# Altium PCB XPIAC-C_1V3.PCBDOC (part 3 of 4)
Units mil, origin at the board's own origin, x right, y up, seen from the top; angles counter-clockwise.
Board outline 2484.32 x 1736.28 mil, 6 copper layers (Top Layer, Internal Plane 1, Mid-Layer 1, Mid-Layer 2, Mid-Layer 3, Bottom Layer); 176 components, 110 nets, 677 pads, 395 vias.
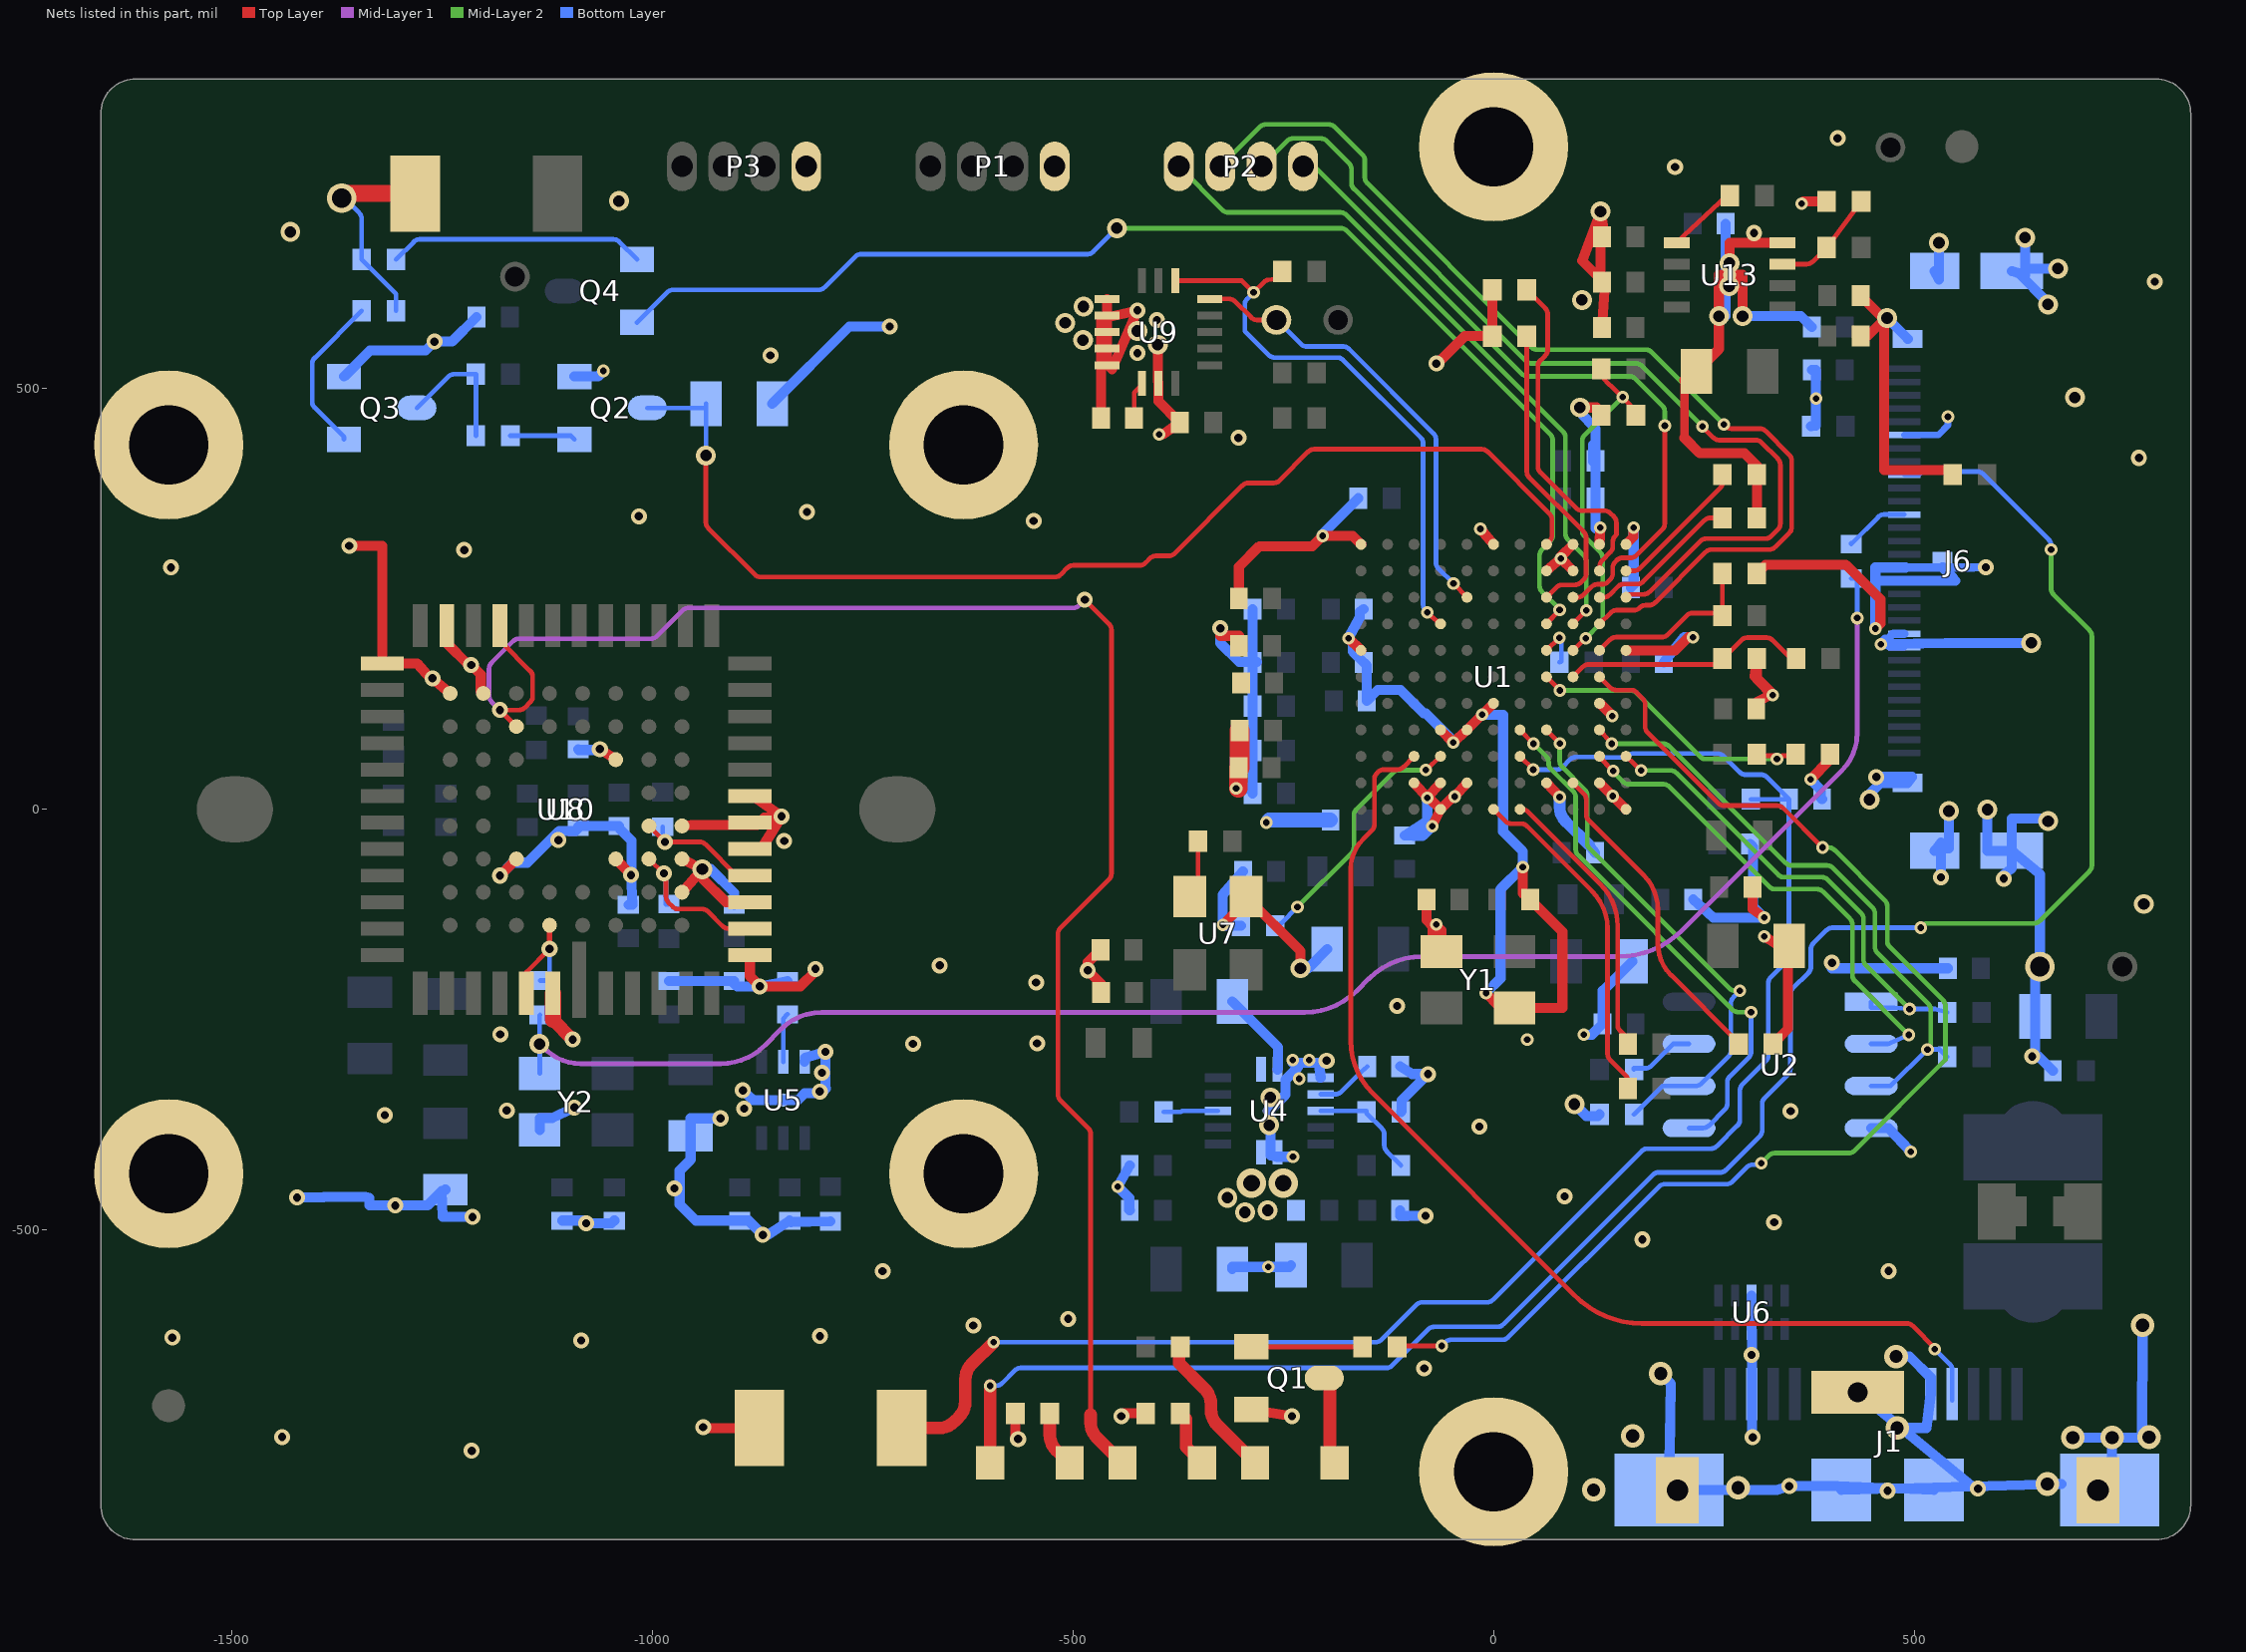
[diagram p7: the nets of this part, all layers, seen from the top]

## Via types
v1: diameter 15, hole 7.87, Top Layer to Bottom Layer, 163 vias
v2: diameter 19, hole 9.84, Top Layer to Bottom Layer, 131 vias
v3: diameter 23.62, hole 13.78, Top Layer to Bottom Layer, 77 vias
v4: diameter 27.95, hole 15.75, Top Layer to Bottom Layer, 17 vias
v5: diameter 0, hole 0, Top Layer to Bottom Layer, 3 vias
v6: diameter 20.47, hole 11.81, Top Layer to Bottom Layer, 2 vias
v7: diameter 35, hole 19.68, Top Layer to Bottom Layer, 2 vias

## Nets (pads, with @x,y where several pads share a name; then routed paths per layer and width w, separated by ;. In a path a pad name is that pad's centre, name@x,y a point inside that pad or via, vN(x,y) a via of type N, cw(c..) or ccw(c..) an arc to the next point about the centre after c; other vN are vias at no path point) (continued)
GND: C1.1 C2.2 C3.1 C4.1 C5.1 C6.1 C7.1 C8.1 C9.1 C10.1 C11.1 C12.1 C13.1 C14.1 C15.1 C16.1 C17.1 C18.2 C19.1 C20.2 C21.1 C22.1 C23.1 C24.1 C25.1 C26.1 C27.1 C28.1 C29.1 C30.2 C31.1 C32.2 C33.1 C34.1 C35.1 C36.2 C37.1 C38.1 C39.1 C40.2 C43.1 C44.1 C45.1 C46.1 C48.1 C49.1 C50.2 C51.1 C52.1 C53.1 C54.1 C55.2 C56.2 C57.1 C58.1 C59.1 C60.1 C61.1 C65.1 C66.1 C68.1 C76.2 C77.1 C78.1 C79.1 C81.1 C82.1 C86.1 C94.1 C95.1 C97.1 C98.1 GND.1 H1.1 H2.1 H3.1 H4.1 H5.1 H6.1 J1.5 J1.8 J1.11 J1.12 J1.13 J1.14 J1.15 J1.16 J1.17 J6.6 J6.16 J6.17 J6.21 J6.22 J6.33 J6.34 J6.35 J6.36 J6.37 J6.38 J6.39 P1.4 P3.4 Q1.2 Q2.2 Q3.2 R4.1 R12.2 R16.2 R17.2 R18.2 R19.2 R20.2 R21.2 R28.2 R29.2 R30.2 R31.2 R32.2 R39.2 R42.2 R53.2 R58.1 R61.1 R67.1 S2.2 U1.A1 U1.A8 U1.B2 U1.B4 U1.B7 U1.B8 U1.B9 U1.D7 U1.D8 U1.E2 U1.E6 U1.G1 U1.G11 U1.K3 U1.K4 U1.L1 U1.L2 U1.L3 U1.L6 U1.L11 U2.4 U4.6 U4.11 U4.12 U4.13 U4.14 U4.15 U5.3 U5.7 U6.3 U6.8 U7.2 U8.B1 U8.C1 U8.C3 U8.C6 U8.D1 U8.F3 U8.H7 U8.H8 U9.9 U9.10 U9.11 U9.12 U9.13 U9.15 U10.7 U10.9 U10.11 U10.12 U10.13 U10.29 U10.31 U10.48 U13.8 U13.9 Y1.2 Y1.4 Y2.2 | length 13355.2
  Top Layer w10: 226.88,441.44 C2.2@226.88,510.2
  Top Layer w12: v2(-1360.14,313.21) -1320.87,313.21 U10.31@-1320.87,173.23 -1279.3,173.23 -1263.55,155.77 v2(-1261.27,155.77) U8.H8@-1240.16,137.8 ; U10.29@-1244.09,218.5 -1244.11,197.42 -1218.39,171.69 v2(-1215.2,171.69) -1203.84,160.34 -1203.84,140.85 U8.H7@-1200.79,137.8 ; v2(-1181.1,-78.74) U8.C6@-1161.42,-59.06 ; v2(-1062.22,71.57) U8.F3@-1043.31,59.06 ; U8.C3@-1043.31,-59.06 v2(-1025.18,-78.13) ; U8.B1@-964.57,-98.43 v3(-940.4,-71.2) ; U8.C1@-964.57,-59.06 v3(-940.4,-71.2) ; U8.D1@-964.57,-19.69 -953.25,-18.6 -875.42,-18.6 -866.86,-10.05 -863.66,-10.05 v2(-846.28,-8.4) ; v2(-939.47,-734.35) -938.48,-735.34 S2.2@-872.67,-735.34 ; U10.7@-883.86,-173.23 -883.86,-198.33 -872.06,-210.12 v2(-872.06,-210.42) -823.94,-210.42 -806.06,-192.54 v2(-806.06,-189.66) ; U10.9@-883.86,-110.24 -912.38,-110.24 -940.06,-82.56 -940.06,-71.55 v3(-940.4,-71.2) ; U10.11@-883.86,-47.24 -866.91,-47.24 -866.91,-41.68 v2(-846.28,-8.4) ; U10.13@-883.86,15.75 -880.34,15.75 v2(-846.28,-8.4) ; R58.1@-568.39,-717.91 -568.39,-745.13 v2(-565.13,-748.39) ; C51.1@-467.34,-166.89 -482.3,-181.85 v2(-482.3,-191.32) -482.3,-191.53 -466.49,-207.35 C25.1@-466.53,-217.63 C25.1@-466.53,-217.63 ; C57.1@-466.52,465.15 -466.52,583.01 v2(-423.28,593.05) -453.51,523.23 U9.13@-459.18,527.93 U9.12@-459.18,547.62 U9.11@-459.18,567.3 U9.10@-459.18,586.99 U9.9@-459.18,606.67 ; v2(-442.36,-721.31) -438.96,-717.91 R67.1@-413.23,-717.91 ; v3(-399.09,552.24) -399.09,510.49 U9.15@-398.15,506.28 -398.15,485.04 -373.07,459.95 C58.1@-372.67,459.95 -392.86,445.8 v1(-397.41,445.8) ; v2(-324.61,215.26) -324.61,206.31 -302.67,206.31 C13.1@-302.67,194.34 ; v1(-321.79,-137.51) -293.97,-108.19 U7.2@-293.97,-103.9 -229.54,-168.33 v3(-229.54,-188.92) ; v1(-306,24.74) v1@-303.09,24.74 ; C40.2@-303.09,49.49 C40.2@-301.69,49.49 ; C4.1@-302.67,250.64 -302.67,288.3 -278.24,312.73 -215.35,312.73 v1(-203.12,324.97) -167.49,324.97 U1.L11@-157.48,314.96 ; Q1.2@-287.83,-713.37 -239.84,-721.04 v2(-239.57,-721.31) ; v1(-172.36,203.3) U1.G11@-157.48,188.98 ; U1.B9@-94.49,31.5 v1(-78.74,13.79) ; C50.2@-79.69,-107.26 -79.69,-131.86 -72.26,-139.28 -72.26,-170.96 Y1.2@-61.81,-169 -61.81,-143.89 -64.77,-140.93 v1(-67.88,-136.78) ; v1(-72.92,-20.14) U1.A8@-62.99,0 ; v2(-67.87,529.81) -66.93,529.81 -34.33,562.41 R16.2@-1.42,562.41 R12.2@-1.42,617.51 ; U1.B8@-62.99,31.5 v1(-78.74,13.79) ; U1.D8@-62.99,94.49 v1(-47.98,79.47) U1.D7@-31.5,94.49 U1.E6@0,125.98 v1(-13.35,112.46) ; U1.B7@-31.5,31.5 v1(-46.27,15.23) -47.76,15.23 U1.A8@-62.99,0 ; v1(-15.67,333.39) U1.L6@0,314.96 ; v1(-9,-218.26) 6.7,-233.96 Y1.4@24.81,-235.92 81.93,-235.92 81.93,-145.51 C49.1@43.69,-107.26 34.8,-99.66 v1(34.8,-68.51) ; U1.B4@62.99,31.5 v1(78.67,14.53) ; U1.K4@62.99,283.46 v1(79.9,298.06) ; U1.K3@94.49,283.46 v1(79.9,298.06) ; U1.L3@94.49,314.96 79.9,300.37 v1(79.9,298.06) ; v3(102.68,477.58) 122.66,477.58 R29.2@128.29,468.3 ; U1.B2@125.98,31.5 v1(141.73,15.75) U1.A1@157.48,0 ; U1.E2@125.98,125.98 127.83,124.52 127.94,124.52 140.93,111.52 v1(140.93,110.94) ; U1.L2@125.98,314.96 v1(126.91,334.91) ; C33.1@129.08,572.7 C55.2@132.64,624.73 ; C16.1@129.08,680.64 132.64,680.59 v3(127.21,710.51) ; U1.G1@157.48,188.98 215.96,188.98 231.8,204.82 v1(236.96,204.66) ; U1.L1@157.48,314.96 166.3,323.78 166.3,334.64 v1(166.51,334.84) ; 226.88,441.44 244.9,423.42 298.13,423.42 313.11,408.44 R17.2@313.11,398 R19.2@313.11,346.42 ; C2.2@226.88,510.2 C2.2@241.22,520.35 267.97,547.1 v3(267.97,586.22) 267.97,635.22 U13.9@280.59,635.22 ; v3(296.07,586.22) 296.07,635.22 U13.9@280.59,635.22 ; C21.1@307.69,-92.52 307.69,-118.42 v1(321.99,-128.72) ; C60.1@312.32,119.41 313.34,120.42 313.34,127.53 v1@331.71,137.17 ; R31.2@313.11,280.21 323.6,290.7 418.86,290.7 459.86,249.7 459.86,220.75 v1(453.98,214.86) ; v1(321.99,-151.09) 351.37,-170.22 C20.2@351.38,-162.25 350.07,-163.57 350.07,-261.01 R21.2@332.19,-278.88 ; U13.8@343.58,673.6 280.59,673.6 U13.9@280.59,635.22 ; v1(366.15,720.06) 368.61,722.52 R53.2@396.05,722.52 ; v1(376.79,35.63) 376.13,35.08 400.2,59.42 R32.2@400.2,65.57 ; C98.1@436.2,562.56 444.7,562.56 v3@466.16,584.02 ; C56.2@436.2,610.56 462.75,584.02 v3@466.16,584.02 ; R30.2@545.55,398 540.09,403.46 464.25,403.46 464.25,543.02 464.25,580.47 v3(467.8,584.02) v3@466.16,584.02 ; v1(-78.74,13.79) -76.78,13.79 U1.A8@-62.99,0 ; v3(127.21,710.51) 127.21,628.54 C55.2@129.08,626.67 C55.2@132.64,624.73 ; v3(127.21,710.51) 105.34,652.03 C55.2@132.64,624.73 ; v1@331.71,137.17 v1(331.69,135.83) 313.11,154.41 R28.2@313.11,179.18 310.56,158.32 v1@331.71,137.17
  Top Layer w15.75: -1118.11,-250.06 v2(-1094.57,-273.6)
  Top Layer w19.68: -1118.11,-250.06 U10.48@-1118.11,-218.5
  Top Layer w21.65: v1@-303.09,24.74 C40.2@-303.09,49.49
  Top Layer w23.62: C40.2@-301.69,49.49 C7.1@-301.69,93.74
  Bottom Layer w7.87: v1(460.28,196.11) 470.2,196.17 470.2,192.91 J6.22@488.19,192.91 ; J6.6@488.19,444.88 528.53,444.88 540.16,456.51 v1(540.16,466.71)
  Bottom Layer w9.84: v1@-46.33,79.47 v1(-13.35,112.46) ; 468.23,201.73 475.16,208.66 J6.21@488.19,208.66 ; J6.16@488.19,287.4 489.78,287.4 533.99,287.4 570.41,287.4 v2(585.24,287.81)
  Bottom Layer w12: v2(-1422.06,-461.35) -1390.87,-461.35 -1390.16,-460.63 -1341.03,-460.63 -1336.13,-461.79 -1336.13,-470.8 v2(-1305.47,-470.8) -1267.2,-470.8 C39.1@-1250.25,-453.85 ; Q3.2@-1366.34,514.5 -1335.33,545.5 -1269.29,545.5 v2(-1258.85,555.94) -1238.04,555.94 C22.1@-1208.79,585.2 ; C39.1@-1245.9,-451.99 C39.1@-1250.25,-453.85 ; v2(-1213.54,-484.47) -1249.34,-484.47 C39.1@-1250.25,-453.85 ; v2(-1181.1,-78.74) -1165.73,-63.37 -1148.46,-63.37 -1110.7,-25.61 -1090.91,-25.61 -1084.99,-19.69 C77.1@-1039.44,-19.69 ; Y2.2@-1133.74,-380.95 -1133.74,-367.17 -1118.98,-367.17 v2(-1092.54,-354.29) ; C46.1@-1107.11,-488.81 -1081.6,-488.81 v2(-1078.44,-491.96) -1048.24,-491.96 C82.1@-1045.08,-488.81 ; Q2.2@-1092.48,514.5 -1064.55,514.5 v1(-1057.91,521.14) ; C44.1@-1088.01,-20.75 -1087.56,-19.69 C77.1@-1039.44,-19.69 ; C61.1@-1088.01,71.28 -1087.29,70.57 -1063.22,70.57 v2(-1062.22,71.57) ; C52.1@-1028.36,-113.51 -1023.62,-113.51 v2(-1025.18,-78.13) -1024.73,-66.55 -1024.73,-37.08 -1039.46,-22.34 C77.1@-1039.44,-19.69 ; C86.1@-980.26,-204.19 C76.2@-905.41,-204.19 ; v3(-940.4,-71.2) -930.69,-70.99 -902.56,-99.11 C48.1@-902.56,-113.51 ; v2(-918.85,-367.28) -954.45,-367.28 C45.1@-954.45,-388.18 -954.45,-416.35 -967.48,-429.38 -967.48,-469.48 -948.16,-488.81 C78.1@-896.1,-488.81 -885.61,-488.81 v2(-868.59,-505.83) -862.82,-505.83 C79.1@-836.63,-488.81 -834.9,-490.54 R42.2@-788.1,-489.59 ; C76.2@-902.56,-204.19 C76.2@-905.41,-204.19 ; v2(-892.23,-334.07) -879.91,-345.5 U5.7@-844.38,-345.53 -826.76,-345.53 -818.89,-337.47 -799.57,-337.47 -798.43,-336.4 -793.84,-331.8 v2@-793.53,-331.8 ; R61.1@-857.35,482.25 -765.78,573.81 v2(-717.66,573.81) ; C81.1@-839.24,-204.19 v2(-872.06,-210.42) -899.18,-210.42 C76.2@-905.41,-204.19 ; U5.3@-818.79,-300.25 -818.49,-295.43 v2(-794.15,-288.17) -794.15,-331.19 v2@-793.53,-331.8 ; v2(-800.78,-335.44) -796.33,-335.44 v2@-793.53,-331.8 ; C36.2@-432.43,-476.51 -433.08,-475.86 -433.08,-461.93 v1(-446.65,-448.37) C37.1@-432.43,-423.19 ; v2(-324.61,215.26) -324.61,197.43 -302.4,175.23 -281.39,175.23 C95.1@-286.22,174.52 ; C65.1@-310.54,-546.32 -310.54,-543.79 v1(-267.78,-543.79) -242.57,-543.79 C34.1@-240.76,-541.97 ; C32.2@-310.54,-228.3 -255.99,-282.86 -255.99,-308.46 U4.15@-256.68,-309.15 ; v1(-306,24.74) -286.22,24.74 C29.1@-286.22,18.91 C24.1@-286.22,69.95 C66.1@-286.22,122.78 C95.1@-286.22,174.52 ; R20.2@-300.24,-138.31 -320.99,-138.31 v1(-321.79,-137.51) -321.79,-101.69 C8.1@-297.87,-73.8 ; C97.1@-286.22,238.01 C95.1@-286.22,174.52 ; v1(-270.04,-15.58) v1@-267.06,-12.6 ; U4.11@-266.52,-358.36 -247.48,-339.32 ; v1(-238.39,-412.92) -257.02,-412.92 -264.94,-411.64 -264.94,-356.78 -247.48,-339.32 ; v3(-229.54,-188.92) -220.44,-188.92 C18.2@-197.54,-166.02 ; U4.6@-205.5,-318.99 -207.47,-301.09 -238.78,-301.09 v1(-238.78,-298.08) -232.63,-304.23 -232.63,-306.75 -247.48,-321.6 -247.48,-339.32 ; v1(-203.12,324.97) -203.12,327.31 C23.1@-160.69,369.74 ; C26.1@-154.11,238.01 -158.94,234.74 -158.94,228.14 v1(-172.36,203.3) -167.25,198.18 -167.25,187.49 C9.1@-154.11,174.52 -150.49,170.9 C10.1@-150.49,128.99 -137.59,141.88 -110.75,141.88 -82.96,114.09 -80.42,114.09 -50.13,83.79 -50.13,82.67 -47.98,80.52 v1(-47.98,79.47) v1@-46.33,79.47 ; C59.1@-110.8,-476.51 -110.8,-483.15 v2(-80.88,-483.15) ; C38.1@-110.8,-305.56 -96.63,-314.58 v2(-77.92,-314.58) -109.33,-345.99 -109.33,-358.88 R18.2@-110.01,-359.56 ; v1(-78.74,13.79) -78.74,-13.67 C19.1@-105.6,-31.24 -94.75,-31.35 -84.13,-31.35 v1(-72.92,-20.14) ; v1(-13.35,112.46) 11.31,112.46 11.31,-26.33 34.8,-49.81 v1(34.8,-68.51) 8.41,-94.9 8.41,-200.85 v1(-9,-218.26) ; v3(96.18,-350.32) 110.33,-364.47 124.12,-364.47 R4.1@126.03,-362.55 ; v3(102.68,477.58) 102.68,472.29 121.12,452.22 C94.1@121.12,414.12 118.63,433.24 118.63,413.56 121.12,411.06 C5.1@121.12,369.74 121.12,334.79 121.19,334.72 121.19,334.21 v1(126.91,334.91) ; v1(107.52,-267.83) 116.8,-267.83 C1.1@129.6,-255.03 129.6,-215.23 130.47,-215.23 C30.2@165.05,-180.65 ; C31.1@113.68,-42.45 C31.1@120.59,-51.64 ; C3.1@163.19,263.56 166.51,266.89 v1(166.51,334.84) ; v4(198.81,-670.78) 210.87,-682.83 J1.16@208.67,-809.05 ; C14.1@202.56,174.71 226.69,204.98 v1(236.96,204.66) ; J1.12@218.51,-809.05 336.87,-809.06 v2(351.48,-804.38) 408.37,-804.38 J1.14@523.63,-809.05 ; C11.1@237.58,-107.03 261.19,-128.72 v1(321.99,-128.72) 308.56,-115.28 308.56,-44.53 C27.1@305.03,-41 ; v3(267.97,586.22) 268.4,586.65 276.08,586.65 C28.1@276.08,696.14 ; v3(296.07,586.22) 365.25,586.22 C54.1@378.25,573.21 ; U6.8@306.84,-578.16 U6.3@306.84,-617.53 307.09,-619.64 J1.8@307.09,-694.88 307.09,-745.33 v2(308.13,-746.38) ; v1(376.79,35.63) 389.08,23.34 389.08,13.56 C35.1@390.57,12.07 ; R39.2@377.47,455.41 382.98,455.77 382.98,482.08 v1(383.45,488.42) 383.23,493.62 383.23,522.21 C53.1@378.25,522.21 ; v2(402.26,-182.36) 402.26,-188.9 C15.1@540.12,-188.9 ; J1.15@413.39,-809.05 674.87,-801.89 v4(658.19,-801.89) ; J1.13@433.07,-692.91 574.33,-809.06 v2(575.95,-807.44) ; v3(447.04,11.61) 447.04,18.36 460.17,31.5 J6.38@492.13,31.5 497.19,38.52 v2(455.1,38.52) ; U2.4@448.9,-378.75 469.57,-378.75 v1(496.01,-406.96) ; v1(453.98,214.86) 453.98,277.29 ; v3(467.8,584.02) 492.77,559.06 J6.37@492.13,559.06 ; 468.23,201.73 465.56,201.73 v1(460.28,196.11) 537,197.59 639.16,197.59 v3(639.33,197.76) ; v4(478.56,-650.3) 494.6,-650.3 519.69,-675.38 J1.5@519.69,-694.88 514.74,-735.2 v4(479.82,-735.2) ; J6.16@489.78,287.4 453.98,287.4 453.98,277.29 ; J6.34@524.41,-49.21 J6.34@526.5,-46.43 ; J6.33@524.41,639.76 529.56,629.92 v3(529.56,673.45) ; v2(531.81,-80.83) 531.81,-39.37 J6.34@526.5,-46.43 ; J6.39@533.99,287.4 546.24,275.15 546.24,274.53 549.11,271.65 J6.17@488.19,271.65 453.98,271.65 453.98,277.29 ; v3(541.36,-1.95) 541.36,-46.43 J6.34@526.5,-46.43 ; v3(587.03,-0.17) 587.03,-49.21 J6.35@616.14,-49.21 ; v2(606.41,-82.43) 606.41,-77.36 616.14,-70.02 J6.35@616.14,-49.21 ; J6.36@616.14,639.76 J6.36@624.18,637.21 ; J6.36@631.82,634.78 J6.36@624.18,637.21 ; J6.36@631.83,634.8 J6.36@631.83,642.81 ; v3(631.83,679.51) J6.36@631.83,642.81 ; v3(659.06,600.07) 659.06,602.33 J6.36@624.18,637.21 ; v3(659.21,-13.97) 659.19,-10.96 616.14,-10.96 J6.35@616.14,-49.21 ; C68.1@664.86,-310.72 647.88,-293.74 v2(640.29,-293.74) 643.86,-290.17 C43.1@643.86,-246.16 643.86,-186.99 GND.1@649.46,-186.99 649.46,-77.12 647.2,-74.87 J6.35@616.14,-49.21 ; v3(670.9,642.81) J6.36@631.83,642.81 ; v4(688.53,-746.67) 770.89,-746.67 v4(771.57,-613.27) ; J1.11@718.51,-809.05 735.24,-806.1 v4(735.24,-746.68)
  Bottom Layer w13.78: v1(78.67,14.53) 78.67,2.55 ccw(c102.79,2.55) 85.73,-14.5 C31.1@113.68,-42.45
  Bottom Layer w17.72: v1@-267.06,-12.6 C6.1@-193.68,-12.6
  other v1: -231.08,-320.15 -219.22,-297.87 40.1,-273.76
  other v2: 468.49,-809.86 -1214.61,-762.31 -1440.03,-745.91 -82.36,-664.34 306.81,-648.41 -1084.48,-631.15 -1570.42,-627.93 -800.66,-626.03 -618.35,-613.55 -505.56,-605.54 -726.25,-548.81 469.57,-548.63 176.84,-511.27 333.61,-490.78 84.63,-460.04 -973.63,-450.49 -16.81,-377.05 -1317.94,-363.35 353.08,-358.6 -1172.94,-357.97 -890.78,-355.66 -798.28,-313.15 -198.4,-298.71 -690,-278.68 -542.51,-278.18 -1180.55,-267.56 -114.49,-233.67 -543.72,-205.86 -658.23,-185.44 -843.11,-37.53 -1111.46,-36.53 -1572.11,287.5 -1223.41,308.24 -546.72,342.83 -1015.83,348.4 -816.03,353.52 767.27,417.74 -303.09,441.55 -859.48,539.52 -423.32,542.22 -400.1,581.62 786.11,627.23 309.71,684.97 215.78,763.37 409.06,797.61
  other v3: -295.5,-479.02 -268.48,-476.52 -316.29,-461.56 -266.61,-375.45 -265.17,-342.36 773,-112.48 691.04,489.53 -488.03,557.66 -423.32,568.57 -509.07,578.15 -487.48,597.53 105.16,605.49 280.01,621.8 280.45,649.21 -1430.14,686.36 -1039.65,723.01
  other v4: 118.95,-808.86 290.73,-806.37 779.18,-746.13 165.26,-744.63
  other v7: -287.6,-444.1 -249.78,-444.1
GPIO45: R6.1 U1.F2 | length 1475.7
  Top Layer w5.6: R6.1@-114.58,-638.96 -113.29,-637.67 v1(-61.69,-637.67) ; U1.F2@125.98,157.48 138.85,144.61 ccw(c145.78,151.54) 145.78,141.74 163.25,141.74 cw(c163.25,131.94) 170.18,138.87 177.3,131.75 cw(c170.37,124.82) 180.17,124.82 180.17,98.36 ccw(c189.97,98.36) 183.04,91.44 267.2,7.28 ccw(c274.13,14.21) 274.13,4.41 337.25,4.41 cw(c337.25,-5.39) 344.18,1.54 v1(391.04,-45.32)
  Mid-Layer 2 w5.6: v1(318.07,-420.69) 327.32,-411.45 cw(c334.25,-418.38) 334.25,-408.58 422.17,-408.58 ccw(c422.17,-398.78) 429.1,-405.71 537.18,-297.63 537.18,-233.88 ccw(c527.38,-233.88) 534.31,-226.95 470.97,-163.62 cw(c477.9,-156.69) 468.1,-156.69 468.1,-115.18 ccw(c458.3,-115.18) 465.23,-108.25 405.16,-48.19 ccw(c398.23,-55.12) 398.23,-45.32 v1(391.04,-45.32)
  Bottom Layer w5.6: v1(-61.69,-637.67) -57.34,-633.32 cw(c-50.41,-640.25) -50.41,-630.45 10.44,-630.45 ccw(c10.44,-620.65) 17.37,-627.58 196.6,-448.35 cw(c203.53,-455.28) 203.53,-445.48 276.86,-445.48 ccw(c276.86,-435.68) 283.79,-442.61 301.17,-425.24 cw(c308.09,-432.16) 308.09,-422.36 318.07,-422.36 v1(318.07,-420.69)
IMU_INT: R44.1 U1.H8 U9.6 | length 726.9
  Top Layer w5.6: U9.6@-378.47,628.33 -299.11,628.33 v1(-285.25,614.46) -273.29,626.42 cw(c-266.36,619.49) -267.77,629.19 -251.17,631.6 R44.1@-251.17,639.23 ; v1(-78.81,234.04) -78.74,233.29 U1.H8@-62.99,220.47
  Bottom Layer w5.6: v1(-285.25,614.46) -292.82,606.9 ; v1(-78.81,234.04) v1@-80.74,235.97 ; -295.69,599.97 cw(c-285.89,599.97) -292.82,606.9 ; -295.69,599.97 cw(c-285.89,599.97) -292.82,606.9 ; -295.69,599.97 -295.69,568.45 -267.04,539.8 ; -267.04,539.8 ccw(c-260.11,546.72) -260.11,536.92 ; -267.04,539.8 ccw(c-260.11,546.72) -260.11,536.92 ; -260.11,536.92 -185.71,536.92 ; -185.71,536.92 cw(c-185.71,527.12) -178.78,534.05 ; -185.71,536.92 cw(c-185.71,527.12) -178.78,534.05 ; -178.78,534.05 -86.48,441.75 ; -86.48,441.75 cw(c-93.41,434.83) -83.61,434.83 ; -86.48,441.75 cw(c-93.41,434.83) -83.61,434.83 ; -83.61,242.9 ccw(c-73.81,242.9) v1@-80.74,235.97 ; -83.61,242.9 ccw(c-73.81,242.9) v1@-80.74,235.97 ; -83.61,242.9 -83.61,434.83
LEDOUT0: LED2.1 U8.G6 U10.27 | length 2065.1
  Top Layer w5.6: v2(-1181.1,118.11) -1158.3,118.11 ccw(c-1158.3,127.91) -1151.37,120.98 -1144.99,127.36 ccw(c-1151.92,134.29) -1142.12,134.29 -1142.12,157.52 ccw(c-1151.92,157.52) -1144.99,164.45 -1178.23,197.7 cw(c-1171.3,204.63) -1181.1,204.63 U10.27@-1181.1,218.5 ; v2(-485.78,249.1) -457.04,220.36 cw(c-463.97,213.43) -454.17,213.43 -454.17,-76.29 cw(c-463.97,-76.29) -457.04,-83.22 -514.84,-141.02 ccw(c-507.91,-147.95) -517.71,-147.95 -517.71,-338.93 ccw(c-507.91,-338.93) -514.84,-345.86 -481.8,-378.89 cw(c-488.73,-385.82) -478.93,-385.82 -478.93,-719.43
  Top Layer w6: v2(-1181.1,118.11) U8.G6@-1161.42,98.43
  Top Layer w15: -478.93,-719.43 -478.93,-728.52 ccw(c-452.68,-728.52) -471.24,-747.08 -441.64,-776.68 LED2.1@-440.94,-776.68
  Mid-Layer 1 w5.5: v2(-1181.1,118.11) -1191.16,128.17 cw(c-1184.35,134.97) -1193.98,134.97 -1193.98,167.17 cw(c-1184.35,167.17) -1191.16,173.98 -1165.15,199.99 cw(c-1158.34,193.19) -1158.34,202.81 -1001.6,202.81 ccw(c-1001.6,212.44) -994.79,205.63 -963.78,236.65 cw(c-956.97,229.84) -956.97,239.47 -499.39,239.47 ccw(c-499.39,249.09) -492.59,242.28 v2(-485.78,249.1)
LEDOUT1: J6.9 LED3.1 | length 2363.4
  Top Layer w15: LED3.1@-598.43,-776.68 v1(-598.43,-685.09)
  Mid-Layer 2 w5.6: v1(507.93,-140.7) 513.15,-135.48 642.35,-135.48 ccw(c642.35,-125.68) 649.28,-132.61 708.42,-73.47 ccw(c701.49,-66.54) 711.29,-66.54 711.29,205.78 ccw(c701.49,205.78) 708.42,212.71 665.67,255.47 cw(c672.59,262.39) 662.79,262.39 v1(662.79,308.61)
  Bottom Layer w5.6: v1(-598.43,-685.09) -591.32,-685.09 ccw(c-591.32,-675.29) -584.39,-682.22 -568.93,-666.76 cw(c-562,-673.69) -562,-663.89 -127.47,-663.89 ccw(c-127.47,-654.09) -120.54,-661.02 -77.39,-617.86 cw(c-70.46,-624.79) -70.46,-614.99 4.79,-614.99 ccw(c4.79,-605.19) 11.72,-612.12 189.4,-434.44 cw(c196.33,-441.37) 196.33,-431.57 269.36,-431.57 ccw(c269.36,-421.77) 276.29,-428.7 316.44,-388.55 ccw(c309.51,-381.62) 319.31,-381.62 319.31,-350.13 cw(c329.11,-350.13) 322.18,-343.2 349.98,-315.41 ccw(c343.05,-308.48) 352.85,-308.48 352.85,-219.76 cw(c362.65,-219.76) 355.72,-212.83 374.35,-194.21 ccw(c367.42,-187.28) 377.22,-187.28 377.22,-166.27 cw(c387.02,-166.27) 380.09,-159.34 395.85,-143.57 cw(c402.78,-150.5) 402.78,-140.7 v1(507.93,-140.7) ; J6.9@488.19,397.64 505.76,397.64 506.85,398.72 cw(c513.78,391.79) 513.78,401.59 574.88,401.59 cw(c574.88,391.79) 581.81,398.72 659.92,320.6 cw(c652.99,313.67) 662.79,313.67 v1(662.79,308.61)
MCLK27M: J6.12 R24.1 | length 77.7
  Bottom Layer w5.6: R24.1@425.08,315.35 425.08,316.15 425.85,316.15 457.23,347.52 cw(c464.16,340.59) 464.16,350.39 J6.12@488.19,350.39
MCLK27M': R22.1 U8.A5 U10.47 | length 141
  Top Layer w5.6: U10.47@-1149.61,-218.5 -1149.61,-193.38 v2(-1122.06,-165.84)
  Top Layer w6: v2(-1122.06,-165.84) U8.A5@-1122.05,-137.8
  Bottom Layer w5.6: R22.1@-1133.41,-203.41 -1122.06,-203.41 v2(-1122.06,-165.84)
MCLK27M_ORG: R22.2 R24.2 Y2.3 | length 2423.1
  Mid-Layer 1 w5.6: v3(-1134.02,-278.86) -1125.02,-286.93 ; v1(432.37,227.36) 432.37,90.95 ; -1125.02,-286.93 ccw(c-1084.92,-242.27) -1084.93,-302.29 ; -1125.02,-286.93 ccw(c-1084.92,-242.27) -1084.93,-302.29 ; -1084.93,-302.29 -918.41,-302.29 ; -918.41,-302.29 ccw(c-918.41,-228.68) -866.36,-280.73 ; -918.41,-302.29 ccw(c-918.41,-228.68) -866.36,-280.73 ; -866.36,-280.73 -847.06,-261.44 ; -847.06,-261.44 cw(c-798.55,-309.95) -798.55,-241.34 ; -847.06,-261.44 cw(c-798.55,-309.95) -798.55,-241.34 ; -798.55,-241.34 -224.67,-241.34 ; -224.67,-241.34 ccw(c-224.67,-153.08) -162.26,-215.49 ; -224.67,-241.34 ccw(c-224.67,-153.08) -162.26,-215.49 ; -162.26,-215.49 -147.83,-201.07 ; -147.83,-201.07 cw(c-84.84,-264.07) -84.84,-174.98 ; -147.83,-201.07 cw(c-84.84,-264.07) -84.84,-174.98 ; -84.84,-174.98 148.26,-174.98 ; 148.26,-174.98 ccw(c148.26,-66.95) 224.64,-143.34 ; 148.26,-174.98 ccw(c148.26,-66.95) 224.64,-143.34 ; 224.64,-143.34 413.59,45.61 ; 413.59,45.61 ccw(c368.24,90.95) 432.37,90.95 ; 413.59,45.61 ccw(c368.24,90.95) 432.37,90.95
  Bottom Layer w5.6: v3(-1134.02,-278.86) v3@-1134.02,-277.84 ; Y2.3@-1133.74,-314.02 -1133.74,-277.56 v3@-1134.02,-277.84 ; R22.2@-1133.41,-244.35 -1134.02,-244.96 v3@-1134.02,-277.84 ; R24.2@425.08,274.4 432.37,274.49 v1(432.37,227.36)
NCS: T5.1 U1.J7 U9.5 | length 540.8
  Top Layer w5.6: U9.5@-337.13,606.67 -314.26,606.67 cw(c-314.26,596.87) -307.33,603.8 -288.1,584.57 ccw(c-281.17,591.5) -281.17,581.7 T5.1@-258.07,581.7 ; v1(-47.56,268.29) U1.J7@-31.5,251.97
  Bottom Layer w5.6: T5.1@-258.07,581.7 -257.56,581.7 -228.82,552.96 ccw(c-221.89,559.89) -221.89,550.09 -178.63,550.09 cw(c-178.63,540.29) -171.7,547.22 -71.31,446.83 cw(c-78.24,439.9) -68.44,439.9 -68.44,293.24 ccw(c-58.64,293.24) -65.57,286.31 v1(-47.56,268.29)
NETC38_2: C38.2 U4.7 | length 68.4
  Bottom Layer w5.6: U4.7@-205.5,-338.68 -188.21,-338.68 ccw(c-188.21,-328.88) -181.28,-335.81 -158.64,-313.17 C38.2@-150.17,-305.56
NETC41_1: C41.1 U1.A5 | length 332.2
  Top Layer w5.5: U1.A5@31.5,0 34.31,0 cw(c34.31,-9.62) 41.12,-2.82 126.43,-88.13 cw(c75.49,-139.07) 147.53,-139.07 147.53,-256.13 ccw(c157.15,-256.13) 150.35,-262.94 159.43,-272.02 159.43,-278.31 C41.1@160,-278.88
NETC42_1: C42.1 U1.A6 | length 405.2
  Top Layer w5.5: U1.A6@0,0 14.1,-14.1 ccw(c20.9,-7.29) 20.9,-16.92 32.69,-16.92 cw(c32.69,-26.54) 39.5,-19.73 117.09,-97.33 cw(c72.58,-141.84) 135.53,-141.84 135.53,-290.51 ccw(c145.15,-290.51) 138.35,-297.32 157.18,-316.16 cw(c150.38,-322.96) 160,-322.96 160,-328.32 C42.1@160,-331.68
NETC57_2: C57.2 U9.14 | length 45
  Top Layer w5.6: C57.2@-427.15,465.15 -427.15,495.53 -417.84,504.84 U9.14@-417.84,506.28
NETC81_2: C81.2 U5.2 | length 58.8
  Bottom Layer w5.5: U5.2@-844.38,-300.25 -844.38,-248.71 C81.2@-839.24,-243.56
NETLED1_1: LED1.1 R5.2 | length 173.6
  Top Layer w15: R5.2@-372.29,-638.96 -373.91,-640.58 -373.91,-658.05 -343.49,-688.47 cw(c-362.05,-707.03) -335.8,-707.03 -335.8,-713.49 ccw(c-309.55,-713.49) -328.11,-732.05 LED1.1@-283.48,-776.68
NETLED1_2: LED1.2 Q1.3 | length 108.7
  Top Layer w15: Q1.3@-201.21,-675.97 -194.46,-683.77 -194.46,-776.68 LED1.2@-188.99,-776.68
NETLED2_2: LED2.2 R67.2 | length 69.5
  Top Layer w15: R67.2@-372.29,-717.91 -365.53,-724.66 -365.53,-757.6 LED2.2@-346.46,-776.68
NETLED3_2: LED3.2 R58.2 | length 67.9
  Top Layer w5.6: LED3.2@-504.89,-776.68 LED3.2@-503.94,-776.68
  Top Layer w15: R58.2@-527.45,-717.91 -527.45,-743.25 ccw(c-501.2,-743.25) -519.76,-761.81 LED3.2@-504.89,-776.68
NETQ1_1: Q1.1 R6.2 | length 132.5
  Top Layer w5.6: Q1.1@-287.83,-638.57 -275.57,-639.37 -275.17,-638.96 R6.2@-155.53,-638.96
NETQ2_1: Q2.1 R60.1 | length 78
  Bottom Layer w5.6: R60.1@-1168.63,444.16 -1096.94,444.16 Q2.1@-1092.48,439.7
NETQ3_1: Q3.1 R62.2 | length 191.9
  Bottom Layer w5.6: Q3.1@-1366.34,439.7 -1366.34,442.47 -1401.36,477.49 cw(c-1394.43,484.42) -1404.23,484.42 -1404.23,529.59 cw(c-1394.43,529.59) -1401.36,536.52 R62.2@-1345.47,592.41
NETQ3_3: Q3.3 R59.1 R60.2 | length 159.5
  Bottom Layer w5.6: Q3.3@-1279.72,477.1 -1242.44,514.38 cw(c-1235.51,507.45) -1235.51,517.25 R59.1@-1209.57,517.25 R60.2@-1209.57,444.16
NETQ4_1: Q4.1 R63.2 | length 305.5
  Bottom Layer w5.6: R63.2@-1304.52,653.5 -1283.43,674.59 cw(c-1276.5,667.66) -1276.5,677.46 -1046.07,677.46 cw(c-1046.07,667.66) -1039.14,674.59 Q4.1@-1018.04,653.49
NETR2_1: R2.1 U2.7 | length 78.6
  Bottom Layer w5.6: R2.1@166.98,-309.35 166.98,-307.78 180.33,-307.78 ccw(c180.33,-297.98) 187.26,-304.91 213.41,-278.75 U2.7@232.36,-278.75
NETR12_1: R12.1 U1.K2 | length 412.2
  Top Layer w5.6: R12.1@39.52,617.51 61.53,595.51 cw(c54.6,588.58) 64.4,588.58 64.4,546.32 cw(c54.6,546.32) 61.53,539.39 55.61,533.47 ccw(c62.53,526.54) 52.73,526.54 52.73,407.61 ccw(c62.53,407.61) 55.61,400.68 98.42,357.86 ccw(c105.35,364.79) 105.35,354.99 131.82,354.99 cw(c131.82,345.19) 138.74,352.12 143.26,347.61 cw(c136.33,340.68) 146.13,340.68 146.13,326.44 144.71,325.03 ccw(c151.64,318.1) 141.84,318.1 141.84,312.64 cw(c132.04,312.64) 138.97,305.71 129.14,295.88 ccw(c136.07,288.95) 126.27,288.95 126.27,283.75 U1.K2@125.98,283.46
NETR14_2: R14.2 U4.3 | length 65.2
  Bottom Layer w5.6: R14.2@-392.27,-359.56 -371.45,-359.56 -370.25,-358.36 U4.3@-327.54,-358.36
NETR15_2: R15.2 R18.1 U4.8 | length 135.5
  Bottom Layer w5.6: U4.8@-205.5,-358.36 -150.95,-358.36 R18.1@-150.95,-359.56 -150.95,-361.14 -132.74,-379.35 cw(c-139.67,-386.28) -129.87,-386.28 -129.87,-399.27 ccw(c-120.07,-399.27) -127,-406.2 R15.2@-110.01,-423.19
NETR16_1: R16.1 U1.J4 | length 370.5
  Top Layer w5.6: R16.1@39.52,562.41 39.52,401.51 ccw(c49.32,401.51) 42.39,394.58 107.17,329.81 cw(c100.24,322.88) 110.04,322.88 110.04,280.09 cw(c100.24,280.09) 107.17,273.16 103.64,269.64 cw(c96.71,276.57) 96.71,266.77 81.85,266.77 ccw(c81.85,256.97) 74.92,263.9 U1.J4@62.99,251.97
NETR17_1: R17.1 U1.K1 | length 169.1
  Top Layer w5.6: U1.K1@157.48,283.46 166.86,283.46 ccw(c166.86,293.26) 173.79,286.33 269.3,381.84 ccw(c262.37,388.77) 272.17,388.77 R17.1@272.17,398
NETR19_1: R19.1 U1.J2 | length 183.6
  Top Layer w5.6: U1.J2@125.98,251.97 131,251.97 ccw(c131,261.77) 137.93,254.84 147.92,264.83 cw(c154.85,257.9) 154.85,267.7 171.02,267.7 ccw(c171.02,277.5) 177.95,270.57 250.92,343.55 cw(c257.85,336.62) 257.85,346.42 R19.1@272.17,346.42
NETR20_1: R20.1 U1.C8 | length 304.7
  Top Layer w5.6: v1(-80.45,46.69) U1.C8@-62.99,62.99
  Mid-Layer 2 w5.6: v1(-233.08,-116.25) -168.79,-51.96 ccw(c-175.71,-45.03) -165.91,-45.03 -165.91,-7.01 cw(c-156.11,-7.01) -163.04,-0.08 -119.14,43.82 cw(c-112.21,36.89) -112.21,46.69 v1(-80.45,46.69)
  Bottom Layer w5.6: R20.1@-259.29,-138.31 -259.2,-138.31 ccw(c-259.2,-128.51) -252.27,-135.44 v1(-233.08,-116.25)
NETR21_1: R21.1 U1.B3 | length 386.2
  Top Layer w5.6: U1.B3@94.49,31.5 107.37,18.62 cw(c100.44,11.69) 110.24,11.69 110.24,-5.91 ccw(c120.04,-5.91) 113.11,-12.84 178.17,-77.9 cw(c136.56,-119.5) 195.4,-119.5 195.4,-159.7 ccw(c247.92,-159.7) 210.78,-196.84 291.25,-277.31 R21.1@291.25,-278.88
NETR27_2: R27.2 U7.3 | length 70.7
  Top Layer w5.6: U7.3@-360.9,-103.9 -351.29,-96.26 R27.2@-351.29,-37.86
NETR53_1: R53.1 R57.2 U13.7 | length 128.6
  Top Layer w5.6: U13.7@343.58,648.01 372.25,648.01 ccw(c372.25,657.81) 379.18,650.88 R57.2@396.05,667.75 R53.1@436.99,722.52
NETR56_2: R56.2 U13.1 | length 85.5
  Top Layer w5.6: U13.1@217.6,673.6 277.21,729.28 R56.2@281.16,729.28
NETR62_1: R62.1 R63.1 S1.2 T6.1 | length 251.8
  Top Layer w5.6: T6.1@-1369.12,726.43 T6.1@-1363.57,731.97
  Top Layer w20: T6.1@-1363.57,731.97 S1.2@-1281.9,731.97
  Bottom Layer w5.6: T6.1@-1369.12,726.43 -1365.8,726.43 -1348.34,708.97 cw(c-1355.27,702.04) -1345.47,702.04 R63.1@-1345.47,653.5 -1304.52,612.55 R62.1@-1304.52,592.41
OTG_ID: J1.4 U1.C9 | length 1317.3
  Top Layer w5.6: U1.C9@-94.49,62.99 -107.37,50.11 cw(c-114.3,57.04) -114.3,47.24 -130.27,47.24 ccw(c-130.27,37.44) -137.2,44.37 -138.76,42.81 ccw(c-131.83,35.88) -141.63,35.88 -141.63,-18.13 cw(c-151.43,-18.13) -144.5,-25.06 -155.18,-35.73 ccw(c-120.16,-70.76) -169.69,-70.76 -169.69,-275.25 ccw(c-82.06,-275.25) -144.02,-337.21 96.93,-578.16 ccw(c176.23,-498.85) 176.23,-611.01 491.21,-611.01 cw(c491.21,-620.81) 498.17,-613.91 525.43,-641.43 v1(524.35,-641.43)
  Bottom Layer w5.6: v1(524.35,-641.43) 542.41,-659.48 cw(c535.48,-666.41) 545.28,-666.41 545.28,-702.75 J1.4@545.28,-694.88
PIN0: P2.4 U1.J3 | length 837.7
  Top Layer w5.6: U1.J3@94.49,251.97 99.94,251.97 ccw(c99.94,261.77) 106.87,254.84 116.66,264.64 cw(c123.59,257.71) 123.59,267.51 129.02,267.51 ccw(c129.02,277.31) 135.95,270.38 138.85,273.27 ccw(c131.92,280.2) 141.72,280.2 141.72,287.23 cw(c151.52,287.23) 144.59,294.16 146.53,296.1 cw(c153.46,289.17) 153.46,298.97 162.84,298.97 ccw(c162.84,308.77) 169.77,301.85 200.72,332.8 ccw(c193.79,339.73) 203.59,339.73 v1(203.59,455.92)
  Mid-Layer 2 w5.6: P2.4@-226.38,764.21 -217.02,764.21 cw(c-217.02,754.41) -210.09,761.34 33.68,517.58 ccw(c40.61,524.51) 40.61,514.71 161.53,514.71 cw(c161.53,504.91) 168.46,511.84 200.72,479.58 cw(c193.79,472.65) 203.59,472.65 v1(203.59,455.92)
PIN1: P2.3 U1.J1 | length 1096.8
  Top Layer w5.6: U1.J1@157.48,251.97 157.48,255.52 178.37,255.52 ccw(c178.37,265.32) 185.3,258.39 245.7,318.79 cw(c252.63,311.86) 252.63,321.66 322.95,321.66 ccw(c322.95,331.46) 329.88,324.53 338.14,332.78 ccw(c331.21,339.71) 341.01,339.71 341.01,409.4 ccw(c331.21,409.4) 338.14,416.33 318.51,435.96 ccw(c311.58,429.03) 311.58,438.83 268.33,438.83 cw(c268.33,448.63) 261.4,441.7 248.34,454.76 v1(248.34,455.25)
  Mid-Layer 2 w5.6: P2.3@-275.59,764.21 -245.18,794.62 cw(c-238.25,787.69) -238.25,797.49 -205.42,797.49 cw(c-205.42,787.69) -198.49,794.62 -171.72,767.86 cw(c-178.65,760.93) -168.85,760.93 -168.85,744.45 ccw(c-159.05,744.45) -165.98,737.52 38.73,532.8 ccw(c45.66,539.73) 45.66,529.93 169.6,529.93 cw(c169.6,520.13) 176.53,527.06 v1(248.34,455.25)
PIN2: P2.2 U1.H2 | length 1235
  Top Layer w5.6: U1.H2@125.98,220.47 139.28,233.77 cw(c146.21,226.84) 146.21,236.64 166.74,236.64 ccw(c166.74,246.44) 173.67,239.51 173.95,239.79 cw(c180.88,232.86) 180.88,242.66 184.86,242.66 ccw(c184.86,252.46) 191.79,245.53 252.1,305.84 cw(c259.03,298.91) 259.03,308.71 327.73,308.71 ccw(c327.73,318.51) 334.66,311.58 351.58,328.49 ccw(c344.65,335.42) 354.45,335.42 354.45,414.51 ccw(c344.65,414.51) 351.58,421.44 323.35,449.67 ccw(c316.42,442.74) 316.42,452.54 282.73,452.54 cw(c282.73,462.34) 275.8,455.41 v1(273.92,457.28)
  Mid-Layer 2 w5.6: P2.2@-324.8,764.21 -277.89,811.12 cw(c-270.96,804.2) -270.96,814 -195.75,814 cw(c-195.75,804.2) -188.82,811.12 -155.81,778.12 cw(c-162.74,771.19) -152.94,771.19 -152.94,751.11 ccw(c-143.14,751.11) -150.07,744.18 44.79,549.32 ccw(c51.72,556.25) 51.72,546.45 180.7,546.45 cw(c180.7,536.65) 187.63,543.58 v1(273.92,457.28)
PIN3: P2.1 U1.H3 | length 831.4
  Top Layer w5.6: U1.H3@94.49,220.47 v1(110.15,236.54)
  Mid-Layer 2 w5.6: P2.1@-374.02,764.21 -322.15,712.35 ccw(c-315.22,719.28) -315.22,709.48 -181.95,709.48 cw(c-181.95,699.68) -175.02,706.61 82.69,448.9 ; 82.69,448.9 cw(c75.76,441.97) 85.56,441.97 85.56,327.44 ccw(c95.36,327.44) 88.43,320.51 107.28,301.65 cw(c100.35,294.72) 110.15,294.72 v1(110.15,236.54)
PIN4: R7.1 R32.1 U1.F4 | length 380.5
  Top Layer w5.6: U1.F4@62.99,157.48 v1(79.04,141.44) ; R7.1@313.11,65.57 323.32,63.9 ccw(c324.89,73.58) 324.89,63.78 336.88,63.78 v1(336.88,59.83) 338.34,61.18 cw(c344.98,53.98) 344.98,63.78 349.02,63.78 ccw(c349.02,73.58) 350.87,63.95 R32.1@359.25,65.57
  Mid-Layer 2 w5.6: v1(79.04,141.44) 162.51,141.44 ; v1(336.88,59.83) 252.24,59.83 ; 162.51,141.44 cw(c162.51,131.64) 169.44,138.57 ; 162.51,141.44 cw(c162.51,131.64) 169.44,138.57 ; 169.44,138.57 245.31,62.7 ; 245.31,62.7 ccw(c252.24,69.63) 252.24,59.83 ; 245.31,62.7 ccw(c252.24,69.63) 252.24,59.83
PIN5: R8.1 R31.1 U1.G2 | length 214.8
  Top Layer w5.6: U1.G2@125.98,188.98 138.86,201.85 cw(c145.79,194.92) 145.79,204.72 200,204.72 ccw(c200,214.52) 206.93,207.59 229.74,230.41 cw(c236.67,223.48) 236.67,233.28 270.5,233.28 R8.1@272.17,230.37 R31.1@272.17,280.21
PIN6: R10.1 R29.1 U1.G3 | length 446.2
  Top Layer w5.6: U1.G3@94.49,188.98 v1(109.56,203.38) ; R10.1@128.29,523.52 130.9,520.91 130.9,515.7 ccw(c140.7,515.7) 133.91,508.63 v1(153.39,489.91) 166.63,475.94 cw(c159.52,469.2) 169.32,469.2 169.32,468.38 R29.1@169.24,468.3
  Mid-Layer 2 w5.6: v1(109.56,203.38) 126.93,220.75 ; v1(153.39,489.91) 108.36,444.89 ; 105.49,331.05 ccw(c115.29,331.05) 108.36,324.12 ; 105.49,331.05 ccw(c115.29,331.05) 108.36,324.12 ; 105.49,331.05 105.49,437.96 ; 105.49,437.96 cw(c115.29,437.96) 108.36,444.89 ; 105.49,437.96 cw(c115.29,437.96) 108.36,444.89 ; 108.36,324.12 126.93,305.55 ; 126.93,220.75 ccw(c120,227.68) 129.8,227.68 ; 126.93,220.75 ccw(c120,227.68) 129.8,227.68 ; 126.93,305.55 cw(c120,298.62) 129.8,298.62 ; 126.93,305.55 cw(c120,298.62) 129.8,298.62 ; 129.8,227.68 129.8,298.62
PIN7: R11.1 R28.1 U1.F3 | length 297.4
  Top Layer w5.6: U1.F3@94.49,157.48 106.41,169.41 cw(c113.34,162.48) 113.34,172.28 272.17,172.28 R28.1@272.17,179.18 272.78,179.18 294.88,201.28 cw(c301.81,194.35) 301.81,204.15 324.46,204.15 cw(c324.46,194.35) 331.39,201.28 350.61,182.05 ccw(c357.54,188.98) 357.54,179.18 R11.1@359.84,179.18
PMODE0: R9.2 U1.G4 | length 56.3
  Top Layer w5.6: U1.G4@62.99,188.98 78.04,204.02 v1(78.37,203.69)
  Bottom Layer w5.6: v1(78.37,203.69) 78.74,204.72 80.72,204.72 80.72,175.75 R9.2@78.4,174.71
PMODE1: Q4.2 U1.H4 | length 1478.7
  Top Layer w5.6: U1.H4@62.99,220.47 v1(78.61,236.94)
  Mid-Layer 2 w5.6: v3(-447.68,690.68) -181.65,690.68 cw(c-181.65,680.88) -174.72,687.81 67.56,445.53 cw(c60.63,438.6) 70.43,438.6 70.43,325.6 cw(c60.63,325.6) 67.56,318.67 57.56,308.66 ccw(c64.49,301.73) 54.69,301.73 54.69,265.5 ccw(c64.49,265.5) 57.56,258.57 78.61,237.52 v1(78.61,236.94)
  Bottom Layer w5.6: Q4.2@-1018.04,578.68 -982.2,614.53 cw(c-975.27,607.6) -975.27,617.4 -802.16,617.4 ccw(c-802.16,627.2) -795.23,620.27 -758.46,657.03 cw(c-751.53,650.1) -751.53,659.9 -482.52,659.9 ccw(c-482.52,669.7) -475.59,662.77 v3(-447.68,690.68)
PMODE2: Q2.3 R61.2 U1.L4 | length 1377.8
  Top Layer w5.6: v3(-936.24,420.55) -936.24,341.05 ccw(c-926.44,341.05) -933.37,334.12 -878.22,278.98 ccw(c-871.3,285.9) -871.3,276.1 -521.37,276.1 ccw(c-521.37,285.9) -514.44,278.98 -506.23,287.18 cw(c-499.3,280.25) -499.3,290.05 -420.68,290.05 ccw(c-420.68,299.85) -413.75,292.92 -408.29,298.38 cw(c-401.36,291.45) -401.36,301.25 -386.03,301.25 ccw(c-386.03,311.05) -379.1,304.12 -298.23,384.99 cw(c-291.3,378.06) -291.3,387.86 -261.43,387.86 ccw(c-261.43,397.66) -254.5,390.73 -220.04,425.2 cw(c-213.11,418.27) -213.11,428.07 -14.14,428.07 cw(c-14.14,418.27) -7.21,425.2 66.54,351.45 cw(c59.61,344.52) 69.41,344.52 69.41,325.44 cw(c59.61,325.44) 66.54,318.51 U1.L4@62.99,314.96
  Bottom Layer w5.6: Q2.3@-1005.87,477.1 -936.09,477.1 R61.2@-936.09,482.25 -936.09,421.3 -936.24,421.15 v3(-936.24,420.55)
RH1: R40.1 U8.C2 U10.8 | length 212
  Top Layer w5.5: U8.C2@-1003.94,-59.06 v2(-986.1,-76.11)
  Top Layer w5.6: v2(-986.1,-76.11) -983.65,-78.56 -983.65,-103.71 ccw(c-973.85,-103.71) -980.78,-110.64 -975.7,-115.72 ccw(c-968.77,-108.79) -968.77,-118.59 -940.64,-118.59 cw(c-940.64,-128.39) -933.72,-121.46 -916.29,-138.88 ccw(c-909.37,-131.95) -909.37,-141.75 U10.8@-883.86,-141.73
  Bottom Layer w5.5: v2(-986.1,-76.11) -983.67,-76.11 -983.67,-112.73 R40.1@-980.26,-112.73
RH2: R41.1 U8.D2 U10.10 | length 164.2
  Top Layer w5.6: U8.D2@-1003.94,-19.69 -986.74,-36.88 v2(-984.91,-38.64) -943.79,-38.64 cw(c-943.79,-48.44) -936.86,-41.51 -899.23,-79.14 -884.25,-79.14 U10.10@-883.86,-78.74
  Bottom Layer w5.5: R41.1@-987.66,-20.47 -987.66,-37 v2(-984.91,-38.64)
ROM_WPN: R3.2 U1.D2 U2.3 | length 721.7
  Top Layer w5.6: U1.D2@125.98,94.49 v1(140.6,77.98)
  Mid-Layer 2 w5.6: v1(140.6,77.98) 201.63,77.98 cw(c201.63,68.18) 208.56,75.11 347.53,-63.86 ccw(c354.46,-56.93) 354.46,-66.73 396.49,-66.73 cw(c396.49,-76.53) 403.42,-69.6 450.5,-116.68 cw(c443.57,-123.61) 453.37,-123.61 453.37,-163.56 ccw(c463.17,-163.56) 456.24,-170.49 516.82,-231.07 cw(c509.89,-238) 519.69,-238 519.69,-277.82 cw(c509.89,-277.82) 516.82,-284.75 v1(515.85,-285.72)
  Bottom Layer w5.6: U2.3@448.9,-328.75 471.89,-328.75 v1@515.39,-285.26 ; v1(515.85,-285.72) v1@515.39,-285.26 ; R3.2@539.33,-294.24 530.35,-285.26 v1@515.39,-285.26
RSTN: C35.2 R13.2 S2.1 U1.C5 | length 1975.7
  Top Layer w5.6: U1.C5@31.5,62.99 v1(47.24,47.24)
  Top Layer w15: S2.1@-703.38,-735.34 -659.51,-735.34 ccw(c-659.51,-709.09) -640.94,-727.65 -635.56,-722.27 ccw(c-654.12,-703.71) -627.87,-703.71 -627.87,-677.56 cw(c-601.62,-677.56) -620.03,-658.84 v1(-594.06,-633.32)
  Bottom Layer w5.6: v1(-594.06,-633.32) -140.26,-633.32 ccw(c-140.26,-623.52) -133.33,-630.45 -91.66,-588.78 cw(c-84.73,-595.71) -84.73,-585.91 -7.66,-585.91 ccw(c-7.66,-576.11) -0.73,-583.04 176.13,-406.18 cw(c183.06,-413.11) 183.06,-403.31 258.38,-403.31 ccw(c258.38,-393.51) 265.31,-400.44 289.99,-375.77 ccw(c283.06,-368.84) 292.86,-368.84 292.86,-333.99 cw(c302.66,-333.99) 295.73,-327.06 323.78,-299 ccw(c316.85,-292.07) 326.65,-292.07 326.65,-206.39 cw(c336.45,-206.39) 329.52,-199.46 348.33,-180.65 ccw(c341.4,-173.72) 351.2,-173.72 C35.2@351.2,12.07 ; v1(47.24,47.24) 74.93,47.24 ccw(c74.93,57.04) 81.86,50.11 91.02,59.28 cw(c97.95,52.35) 97.95,62.15 123.68,62.15 124.09,61.74 157.61,61.74 159.45,63.58 cw(c166.38,56.65) 166.38,66.45 266.29,66.45 cw(c266.29,56.65) 273.22,63.58 292.71,44.09 ccw(c299.63,51.02) 299.63,41.22 317.99,41.22 cw(c317.99,31.42) 324.91,38.35 C35.2@351.2,12.07 ; R13.2@305.82,12.07 C35.2@351.2,12.07
SPI_MISO: U1.C2 U2.2 | length 590.6
  Top Layer w5.6: U1.C2@125.98,62.99 141.39,45.41 v1(142.11,45.5)
  Mid-Layer 2 w5.6: v1(142.11,45.5) 141.7,45.09 154.03,32.77 ccw(c160.96,39.69) 160.96,29.89 201.93,29.89 cw(c201.93,20.09) 208.86,27.02 327.81,-91.93 ccw(c334.74,-85) 334.74,-94.8 384.57,-94.8 cw(c384.57,-104.6) 391.5,-97.67 423.7,-129.87 cw(c416.77,-136.8) 426.57,-136.8 426.57,-197.07 ccw(c436.37,-197.07) 429.44,-204 v1(493.54,-268.11)
  Bottom Layer w5.6: U2.2@448.9,-278.75 467.49,-278.75 ccw(c467.49,-268.95) 471.46,-277.91 v1(493.54,-268.11)
SPI_MOSI: U1.D5 U2.5 | length 637.3
  Top Layer w5.6: U1.D5@31.5,94.49 47.38,77.93 v1(47.5,78.05)
  Mid-Layer 2 w5.6: v1(47.5,78.05) 62.67,62.88 cw(c55.74,55.95) 65.54,55.95 65.54,54.69 ccw(c75.34,54.69) 68.41,47.76 94.79,21.38 cw(c87.86,14.45) 97.66,14.45 97.66,-47.77 ccw(c107.46,-47.77) 100.53,-54.7 283.97,-238.14 ccw(c290.9,-231.21) 290.9,-241.01 v1(306.19,-241.01)
  Bottom Layer w5.6: U2.5@232.36,-378.75 248.97,-378.75 ccw(c248.97,-368.95) 255.9,-375.88 274.95,-356.83 ccw(c268.02,-349.9) 277.82,-349.9 277.82,-324.54 cw(c287.62,-324.54) 280.69,-317.61 303.32,-294.98 ccw(c296.39,-288.05) 306.19,-288.05 v1(306.19,-241.01)
SPI_SCK: R4.2 U1.D4 U2.6 | length 632.4
  Top Layer w5.6: U1.D4@62.99,94.49 78.74,78.49 v1(78.7,78.22)
  Mid-Layer 2 w5.6: v1(78.7,78.22) 78.7,57.22 ccw(c88.5,57.22) 81.57,50.29 108.54,23.33 cw(c101.61,16.4) 111.41,16.4 111.41,-39.92 ccw(c121.21,-39.92) 114.28,-46.85 280.06,-212.64 ccw(c286.99,-205.71) 286.99,-215.51 291.44,-215.51 291.7,-215.78 v1(292.74,-215.78)
  Bottom Layer w5.6: R4.2@166.98,-362.55 200.78,-328.75 U2.6@232.36,-328.75 240.35,-328.75 ccw(c240.35,-318.95) 247.28,-325.88 279.23,-293.93 ccw(c272.3,-287) 282.1,-287 282.1,-230.47 cw(c291.9,-230.47) 284.97,-223.54 v1(292.74,-215.78)
SPI_SSN: R1.2 U1.C1 U2.1 | length 590.1
  Top Layer w5.6: U1.C1@157.48,62.99 v1(175.38,46.27)
  Mid-Layer 2 w5.6: v1(175.38,46.27) 210.36,46.27 cw(c210.36,36.47) 217.29,43.4 338.44,-77.75 ccw(c345.37,-70.82) 345.37,-80.62 390.38,-80.62 cw(c390.38,-90.42) 397.31,-83.49 436.87,-123.05 cw(c429.94,-129.98) 439.74,-129.98 439.74,-178.44 ccw(c449.54,-178.44) 442.61,-185.37 v1(494.57,-237.32)
  Bottom Layer w5.6: U2.1@448.9,-228.75 448.9,-235.64 476.46,-235.64 v1(494.57,-237.32) 524.89,-237.32 R1.2@539.33,-241.26